# EAGLE board Seguidor_solar (EAGLE 9.7.0)

Size 172.55 x 166.64 mm. Coordinates in mm from the lower left corner, seen from the top.
Outline: 0,0 172.55,0 172.55,166.64 0,166.64 0,0
Copper layers (1*16): Top 0.035mm / dielectric 1.5mm / Bottom 0.035mm
Design rules "default": minimum track width 6mil, minimum drill 0.35mm, track to track 6mil, track to pad 6mil, pad to pad 6mil, via to via 6mil, smd to smd 6mil, copper to edge 40mil, drill to drill 6mil, minimum pad ring 10mil, minimum via ring 8mil, stop-mask expansion 4mil, vias tented up to drill 0mil, thermal gap 10mil

## Footprints (pad centres in the part's own frame; a part is rotated, then mirrored left to right if it is on the bottom)
RESAD1016W63L850D250B = drill 0.83 pad 1.43: 1 -5.08,0; 2 5.08,0
GL5528 = drill 0.8 pad 1.4: 1 -1.702,0; 2 1.702,0
SG90 = drill 1.016 long: 1 -2.54,0; 2 0,0; 3 2.54,0
ARDUINO-UNO-R3-SHIELD = drill 1.016 pad 1.88: 3.3V 24.13,-2.54; 5V 24.13,0; A0 24.13,12.7; A1 24.13,15.24; A2 24.13,17.78; A3 24.13,20.32; A4 24.13,22.86; A5 24.13,25.4; AREF -24.13,-13.97; D2 -24.13,20.32; D3 -24.13,17.78; D4 -24.13,15.24; D5 -24.13,12.7; D6 -24.13,10.16; D7 -24.13,7.62; D8 -24.13,3.81; D9 -24.13,1.27; D10 -24.13,-1.27; D11 -24.13,-3.81; D12 -24.13,-6.35; D13 -24.13,-8.89; GND@0 24.13,2.54; GND@1 24.13,5.08; GND@2 -24.13,-11.43; IOREF 24.13,-7.62; NC 24.13,-10.16; RES 24.13,-5.08; RX -24.13,25.4; SCL -24.13,-19.05; SDA -24.13,-16.51; TX -24.13,22.86; VIN 24.13,7.62

## Placement (x,y rotation side)
R5  10k  [RESAD1016W63L850D250B]  101.95,118.21 270 top
R6  10k  [RESAD1016W63L850D250B]  101.95,82.65 90 top
R7  10k  [RESAD1016W63L850D250B]  40.99,82.65 90 top
R8  10k  [RESAD1016W63L850D250B]  40.99,118.21 270 top
RLOWER-LEFT  PHOTOCELL_GL5528  [GL5528]  5.71,102.71 0 top
RLOWER-RIGHT  PHOTOCELL_GL5528  [GL5528]  122.79,100.54 0 top
RUPPER-LEFT  PHOTOCELL_GL5528  [GL5528]  34.9,159.65 0 top
RUPPER-RIGHT  PHOTOCELL_GL5528  [GL5528]  118.5,155.68 0 top
SERVOEJE-X  SERVOSG90  [SG90]  164.84,102.67 90 top
SERVOEJE-Y  SERVOSG90  [SG90]  165.57,79.81 90 top
U1  ARDUINO-UNO-R3-SHIELD  [ARDUINO-UNO-R3-SHIELD]  53.21,29.84 270 top

## Library data of the parts
R5-R8 RLOWER-LEFT RLOWER-RIGHT RUPPER-LEFT RUPPER-RIGHT SERVOEJE-X SERVOEJE-Y U1 = Tinkercad

## Nets
U1_5V: R5.1 R6.1 R7.1 R8.1 SERVOEJE-X.2 SERVOEJE-Y.2 U1.5V
U1_A0: R8.2 RUPPER-LEFT.1 U1.A0
U1_A1: R5.2 RUPPER-RIGHT.1 U1.A1
U1_A2: R6.2 RLOWER-RIGHT.1 U1.A2
U1_A3: R7.2 RLOWER-LEFT.1 U1.A3
U1_D9: SERVOEJE-X.3 U1.D9
U1_D10: SERVOEJE-Y.3 U1.D10
U1_GND: RLOWER-LEFT.2 RLOWER-RIGHT.2 RUPPER-LEFT.2 RUPPER-RIGHT.2 SERVOEJE-X.1 SERVOEJE-Y.1 U1.GND@0 U1.GND@1 U1.GND@2

## Tracks (layer width: path | path; a pad name or v marks a point on that pad's centre or on a via)
U1_5V  (6 unrouted)
U1_A0  (2 unrouted)
U1_A1  (2 unrouted)
U1_A2  (2 unrouted)
U1_A3  (2 unrouted)
U1_D9  (1 unrouted)
U1_D10  (1 unrouted)
U1_GND  (8 unrouted)